# Altium PCB BRAKE PCB PROFILE.PcbDoc
Units mil, origin at the board's own origin, x right, y up, seen from the top; angles counter-clockwise.
Board outline 7818.87 x 3566.84 mil, 2 copper layers (Top Layer, Bottom Layer); 93 components, 80 nets, 336 pads, 27 vias.
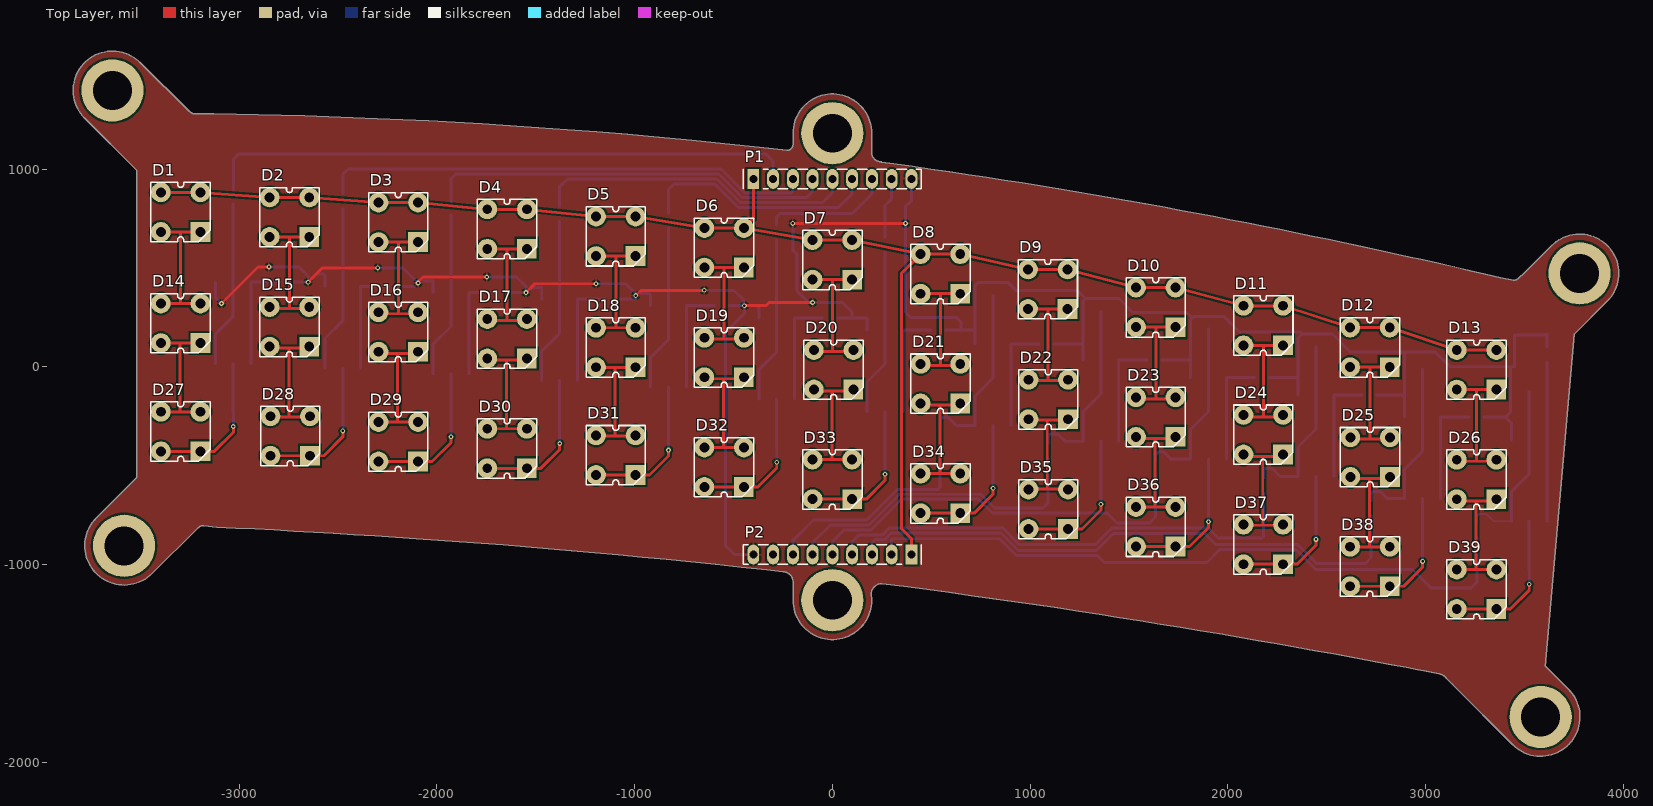
[diagram p0: Top Layer view]
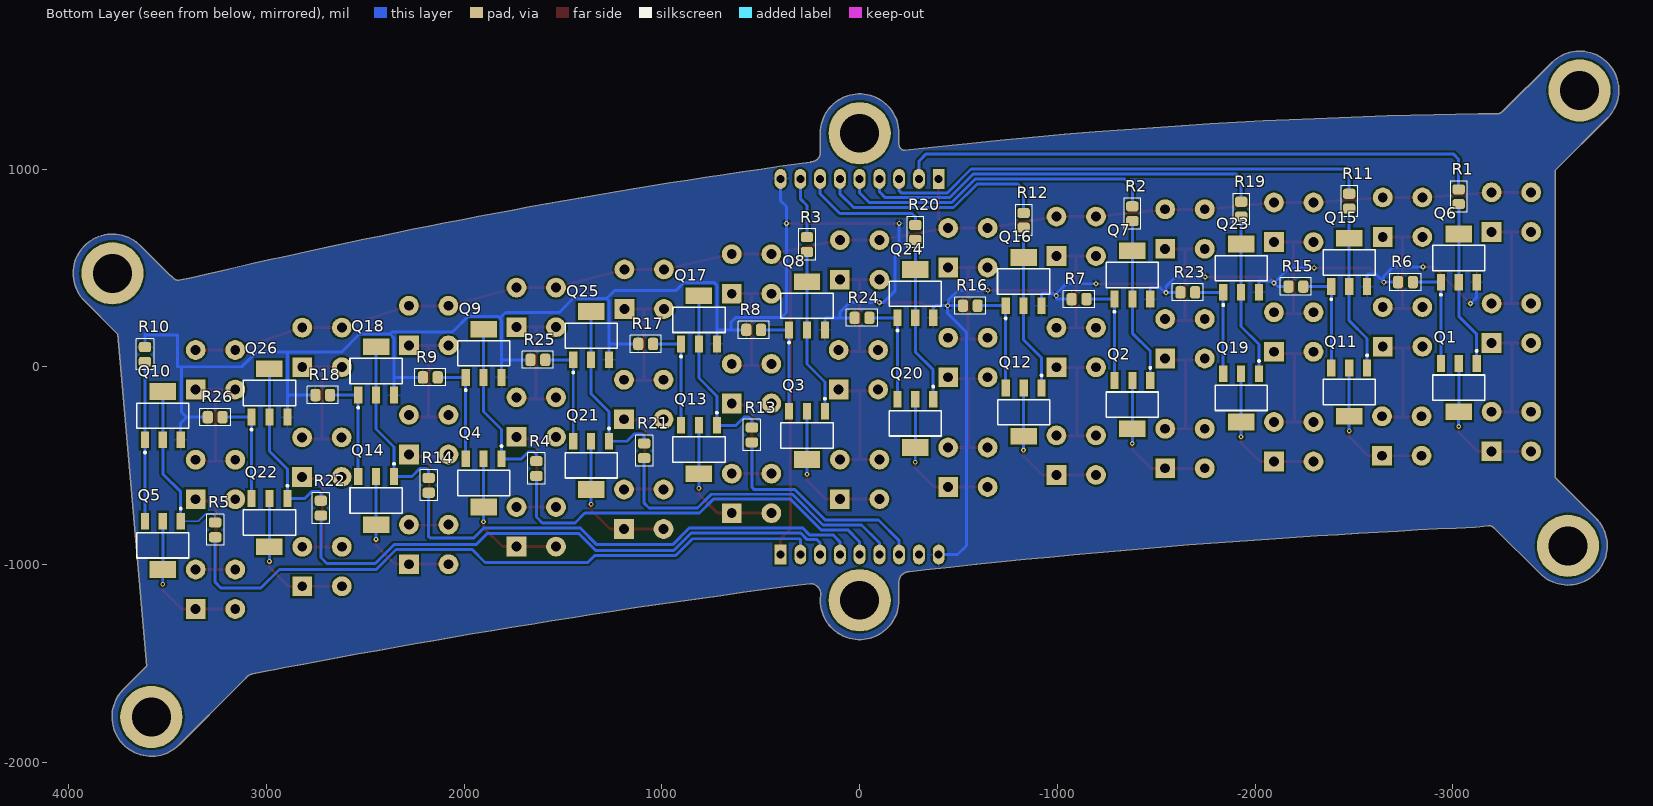
[diagram p1: Bottom Layer view, seen from below]
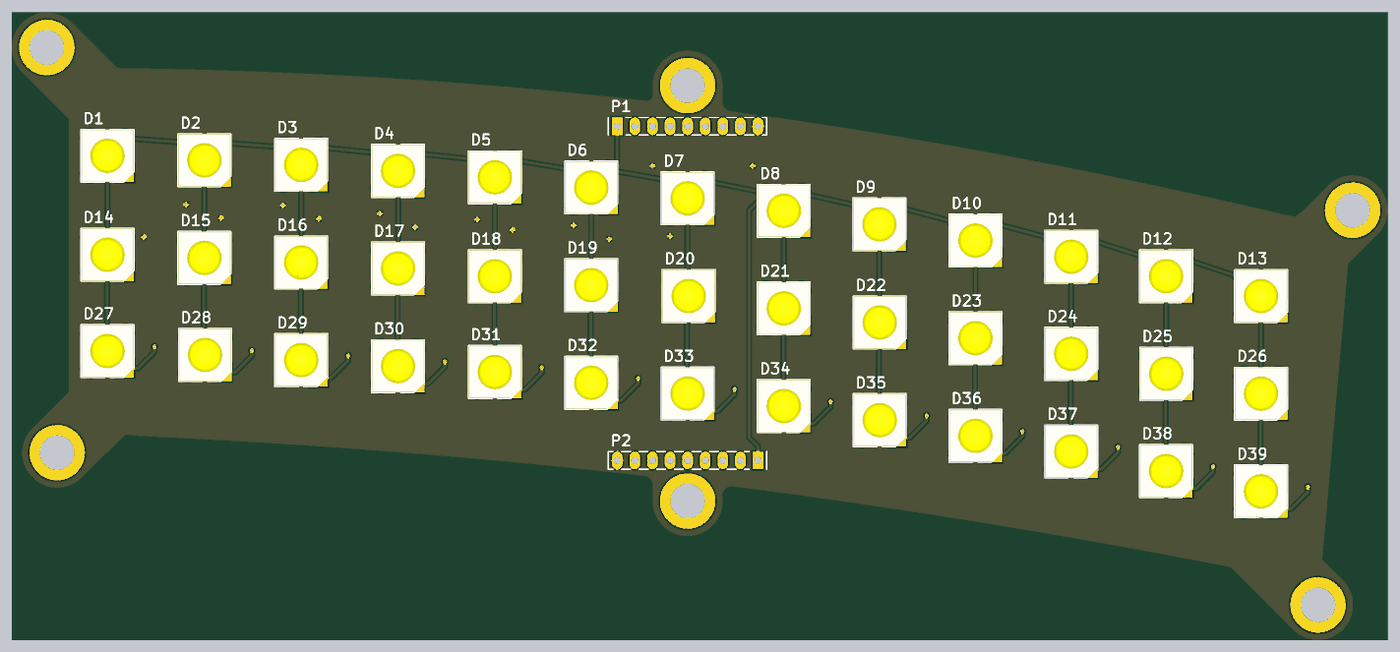
[diagram p2: 3D render of the assembled board from above, using the file's embedded part models]
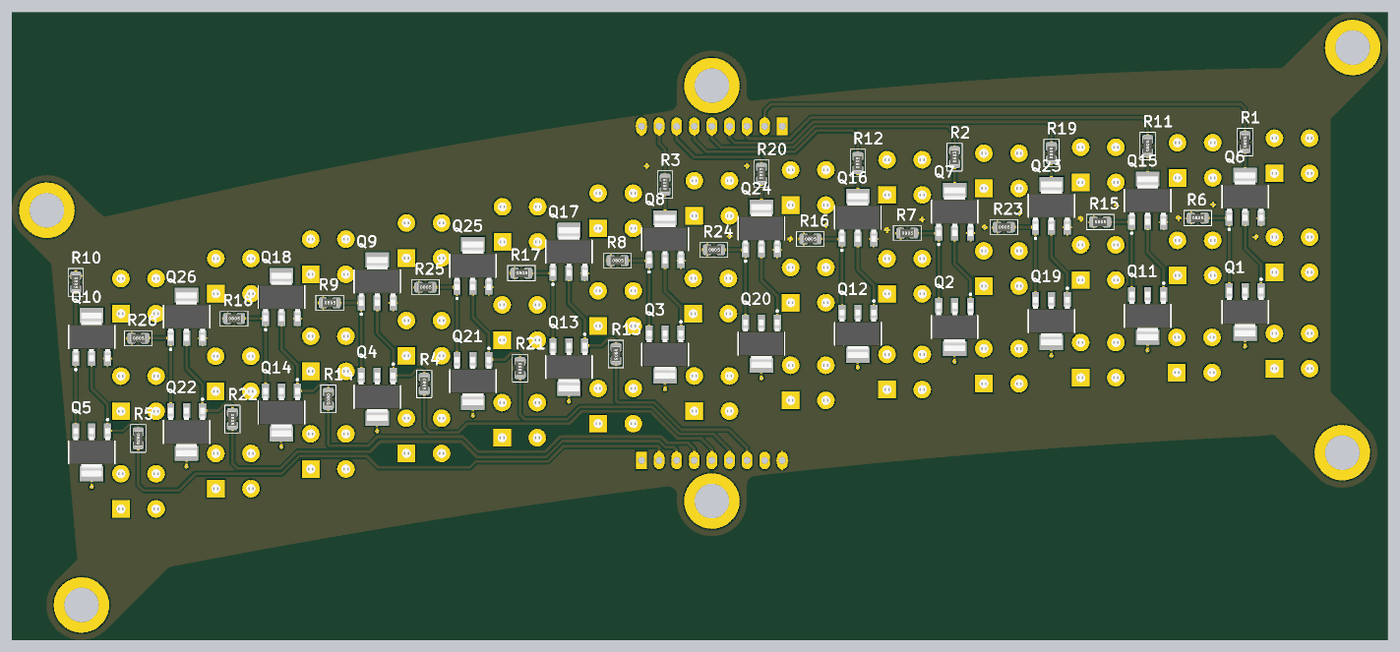
[diagram p3: 3D render of the assembled board from below, using the file's embedded part models]

## Layer stack, top to bottom
Top Solder: solder mask 0.4, Solder Resist, Dk 3.5
Top Layer: signal copper 1.4
Dielectric 1: dielectric 12.6, FR-4, Dk 4.8
Bottom Layer: signal copper 1.4
Bottom Solder: solder mask 0.4, Solder Resist, Dk 3.5

## Board outline
401 vertices, not listed, extent -3840.52,-1970.41 3978.35,1596.43

## Design rules (kind name [scope] priority, off if disabled: settings)
Clearance [All] p1: gap=10
PolygonConnect [All] p1: connectstyle=Relief reliefconductorwidth=10 reliefentries=4 polygonreliefangle="90 Angle" airgapwidth=10
RoomDefinition Indicator [InComponentClass('Indicator')] p1: confinementstyle=ConfineIn formatcopy=TRUE lockcomponents=FALSE outline -4345,-2195 5215,-2195 5215,2075 -4345,2075
RoutingVias [All] p1: holewidth=28 width=50 viastyle="Through Hole" minholewidth=12 minwidth=24 maxholewidth=28 maxwidth=50
SolderMaskExpansion [All] p1: expansion=4
Width [All] p1: maxlimit=100 minlimit=10 preferedwidth=10
30 further rules are at their usual default settings.

## Components (designator, comment, footprint, x,y, rotation, side; value= is the part's Value field where it differs from the comment)
D1 "AMBER" "CREE P4 YELLOW"#1 -3296.96,782.24 r180 top
D2 "AMBER" "CREE P4 YELLOW"#1 -2746.38,756.42 r180 top
D3 "AMBER" "CREE P4 YELLOW"#1 -2195.81,730.61 r180 top
D4 "AMBER" "CREE P4 YELLOW"#1 -1645.69,696.46 r180 top
D5 "AMBER" "CREE P4 YELLOW"#1 -1095.52,659.72 r180 top
D6 "AMBER" "CREE P4 YELLOW"#1 -547.76,601.72 r180 top
D7 "AMBER" "CREE P4 YELLOW"#1 0,540.4 r180 top
D8 "AMBER" "CREE P4 YELLOW"#1 546.6,469.46 r180 top
D9 "AMBER" "CREE P4 YELLOW"#1 1090,392.31 r180 top
D10 "AMBER" "CREE P4 YELLOW"#1 1635.86,300.24 r180 top
D11 "AMBER" "CREE P4 YELLOW"#1 2180,208.31 r180 top
D12 "AMBER" "CREE P4 YELLOW"#1 2719.2,97.88 r180 top
D13 "AMBER" "CREE P4 YELLOW"#1 3258.6,-15.47 r180 top
D14 "AMBER" "CREE P4 YELLOW"#1 -3296.96,219.72 r180 top
D15 "AMBER" "CREE P4 YELLOW"#1 -2746.38,201.54 r180 top
D16 "AMBER" "CREE P4 YELLOW"#1 -2195.81,175.73 r180 top
D17 "AMBER" "CREE P4 YELLOW"#1 -1645.69,141.58 r180 top
D18 "AMBER" "CREE P4 YELLOW"#1 -1095.52,97.21 r180 top
D19 "AMBER" "CREE P4 YELLOW"#1 -547.76,46.84 r180 top
D20 "AMBER" "CREE P4 YELLOW"#1 6.11,-15.28 r180 top
D21 "AMBER" "CREE P4 YELLOW"#1 546.6,-85.42 r180 top
D22 "AMBER" "CREE P4 YELLOW"#1 1091.91,-165.64 r180 top
D23 "AMBER" "CREE P4 YELLOW"#1 1635.86,-254.65 r180 top
D24 "AMBER" "CREE P4 YELLOW"#1 2179.8,-343.65 r180 top
D25 "AMBER" "CREE P4 YELLOW"#1 2720.14,-457.19 r180 top
D26 "AMBER" "CREE P4 YELLOW"#1 3258.6,-570.36 r180 top
D27 "AMBER" "CREE P4 YELLOW"#1 -3296.96,-327.91 r180 top
D28 "AMBER" "CREE P4 YELLOW"#1 -2742.54,-350.23 r180 top
D29 "AMBER" "CREE P4 YELLOW"#1 -2195.81,-379.54 r180 top
D30 "AMBER" "CREE P4 YELLOW"#1 -1645.69,-413.68 r180 top
D31 "AMBER" "CREE P4 YELLOW"#1 -1095.52,-447.11 r180 top
D32 "AMBER" "CREE P4 YELLOW"#1 -547.76,-508.43 r180 top
D33 "AMBER" "CREE P4 YELLOW"#1 0,-569.75 r180 top
D34 "AMBER" "CREE P4 YELLOW"#1 546.6,-640.69 r180 top
D35 "AMBER" "CREE P4 YELLOW"#1 1091.91,-720.91 r180 top
D36 "AMBER" "CREE P4 YELLOW"#1 1635.86,-809.91 r180 top
D37 "AMBER" "CREE P4 YELLOW"#1 2179.8,-898.92 r180 top
D38 "AMBER" "CREE P4 YELLOW"#1 2719.2,-1010.28 r180 top
D39 "AMBER" "CREE P4 YELLOW"#2 3258.6,-1125.62 r0 top
P1 "Header 9" "HEADER 1x9" 0,950 r0 top
P2 "Header 9" "HEADER 1x9" 0,-950 r180 top
Q1 "BCP56" SOT223 -3030.86,-105.86 r0 bottom
Q2 "BCP56" SOT223 -1379.59,-191.64 r0 bottom
Q3 "BCP56" SOT223 266.1,-347.7 r0 bottom
Q4 "BCP56" SOT223 1901.96,-587.86 r0 bottom
Q5 "BCP56" SOT223 3524.7,-903.57 r0 bottom
Q6 "BCP56" SOT223 -3030.86,550 r180 bottom
Q7 "BCP56" SOT223 -1379.59,464.23 r180 bottom
Q8 "BCP56" SOT223 266.1,308.16 r180 bottom
Q9 "BCP56" SOT223 1901.95,68 r180 bottom
Q10 "BCP56" SOT223 3524.7,-247.71 r180 bottom
Q11 "BCP56" SOT223 -2476.44,-128.19 r0 bottom
Q12 "BCP56" SOT223 -830,-230 r0 bottom
Q13 "BCP56" SOT223 812.7,-418.64 r0 bottom
Q14 "BCP56" SOT223 2445.9,-676.87 r0 bottom
Q15 "BCP56" SOT223 -2476.45,527.68 r180 bottom
Q16 "BCP56" SOT223 -829.42,430.8 r180 bottom
Q17 "BCP56" SOT223 812.69,237.22 r180 bottom
Q18 "BCP56" SOT223 2445.9,-21.01 r180 bottom
Q19 "BCP56" SOT223 -1929.71,-157.49 r0 bottom
Q20 "BCP56" SOT223 -281.66,-286.38 r0 bottom
Q21 "BCP56" SOT223 1358.01,-498.86 r0 bottom
Q22 "BCP56" SOT223 2985.3,-788.23 r0 bottom
Q23 "BCP56" SOT223 -1929.71,498.37 r180 bottom
Q24 "BCP56" SOT223 -281.66,369.48 r180 bottom
Q25 "BCP56" SOT223 1358.01,157 r180 bottom
Q26 "BCP56" SOT223 2985.3,-132.37 r180 bottom
R1 "1k" "RESISTOR 0805" -3030,860 r90 bottom
R2 "1k" "RESISTOR 0805" -1379.59,774.23 r90 bottom
R3 "1k" "RESISTOR 0805" 266.1,618.16 r90 bottom
R4 "1k" "RESISTOR 0805" 1635,-515 r270 bottom
R5 "1k" "RESISTOR 0805" 3260,-825 r270 bottom
R6 "8R2" "RESISTOR 0805" -2761.16,427.95 r180 bottom
R7 "8R2" "RESISTOR 0805" -1109.89,342.18 r180 bottom
R8 "8R2" "RESISTOR 0805" 535.8,186.11 r180 bottom
R9 "8R2" "RESISTOR 0805" 2171.65,-54.05 r180 bottom
R10 "8R2" "RESISTOR 0805" 3615,62.29 r270 bottom
R11 "1k" "RESISTOR 0805" -2476.45,837.68 r90 bottom
R12 "1k" "RESISTOR 0805" -829.42,740.8 r90 bottom
R13 "1k" "RESISTOR 0805" 545,-345 r270 bottom
R14 "1k" "RESISTOR 0805" 2180,-600 r270 bottom
R15 "8R2" "RESISTOR 0805" -2206.75,405.63 r180 bottom
R16 "8R2" "RESISTOR 0805" -559.72,308.76 r180 bottom
R17 "8R2" "RESISTOR 0805" 1082.39,115.18 r180 bottom
R18 "8R2" "RESISTOR 0805" 2715.6,-143.06 r180 bottom
R19 "1k" "RESISTOR 0805" -1930,797.4 r90 bottom
R20 "1k" "RESISTOR 0805" -281.66,679.48 r90 bottom
R21 "1k" "RESISTOR 0805" 1090,-425 r270 bottom
R22 "1k" "RESISTOR 0805" 2725,-715 r270 bottom
R23 "8R2" "RESISTOR 0805" -1660.01,376.32 r180 bottom
R24 "8R2" "RESISTOR 0805" -11.96,247.44 r180 bottom
R25 "8R2" "RESISTOR 0805" 1627.71,34.96 r180 bottom
R26 "8R2" "RESISTOR 0805" 3260,-255 r180 bottom

## Footprints (in the part's own frame and the unit in brackets; to place one, negate y for a bottom-side part, rotate by r counter-clockwise, add the part's x,y. Pads: shape width x height; smd on the part's side, far side on the other; paste and mask are expansions set on the pad)
"CREE P4 YELLOW"#1 [mil] "CREE P4 YELLOW"
  rect 100x100 hole 50: 1(-100,100)
  round 100 hole 50: 2(-100,-100) 3(100,-100) 4(100,100)
  silkscreen extent -150,-150 150,150, body extent -150,-150 150,150, height 272
"CREE P4 YELLOW"#2 [mil] "CREE P4 YELLOW"
  rect 100x100 hole 50: 1(100,-100)
  round 100 hole 50: 2(100,100) 3(-100,100) 4(-100,-100)
  silkscreen extent -150,-150 150,150, body extent -150,-150 150,150, height 272
"HEADER 1x9" [mil]
  rect 60x100 hole 40: 1(-400,0)
  oval 60x100 hole 40: 2(-300,0) 3(-200,0) 4(-100,0) 5(0,0) 6(100,0) 7(200,0) 8(300,0) 9(400,0)
  silkscreen extent -450,-50 450,50
"RESISTOR 0805" [mm]
  rrect50% 1.3x1.6 smd: 1(-0.95,0) 2(0.95,0)
  silkscreen extent -2,-1.1 2,1.1, body extent -1.25,-0.62 1.25,0.62, height 0.8
SOT223 [mm] "SOT-223/SC-73; 4 Leads; Body 6.7 x 7.3 mm, inc. leads (LxW max)"
  rect 1.05x2.15 smd: 1(-2.3,-3.1) 2(0,-3.1) 3(2.3,-3.1)
  rect 3.4x2.15 smd: 2(0,3.1)
  silkscreen extent -3.35,-4.85 3.35,1.62, body extent -3.25,-3.5 3.25,3.5, height 1.67

## Part data
D1 D2 D3 D4 D5 D6 D7 D8 D9 D10 D11 D12 D13 D14 D15 D16 D17 D18 D19 D20 D21 D22 D23 D24 D25 D26 D27 D28 D29 D30 D31 D32 D33 D34 D35 D36 D37 D38 D39: library part CP41B-AFSCM0Q0264, "CREE AMBER LED P4 (SUPERFLUX)"
P1 P2: "Header, 9-Pin"
Q1 Q2 Q3 Q4 Q5 Q6 Q7 Q8 Q9 Q10 Q11 Q12 Q13 Q14 Q15 Q16 Q17 Q18 Q19 Q20 Q21 Q22 Q23 Q24 Q25 Q26: library part NPN, "BCP56 80 V, 1 A NPN medium power transistors"
R1 R2 R3 R4 R5 R6 R7 R8 R9 R10 R11 R12 R13 R14 R15 R16 R17 R18 R19 R20 R21 R22 R23 R24 R25 R26: library part Res2, "Resistor"

## Free pads (board coordinates)
  round 314.96 hole 196.85 unplated: MOUNT(-3641.73,1397.64) MOUNT(-3582.99,-905.93) MOUNT(0,-1181.1) MOUNT(0,1181.1) MOUNT(3582.68,-1771.65) MOUNT(3779.53,472.44)

## Via types
v1: diameter 24, hole 12, Top Layer to Bottom Layer, 27 vias

## Nets (pads, with @x,y where several pads share a name; then routed paths per layer and width w, separated by ;. In a path a pad name is that pad's centre, name@x,y a point inside that pad or via, vN(x,y) a via of type N, cw(c..) or ccw(c..) an arc to the next point about the centre after c; other vN are vias at no path point)
DRIVE_0: P1.2 R1.2 | length 2997.5
  Bottom Layer w15: R1.2 -3030,1050 -3005,1075 -335,1075 -300,1040 P1.2
DRIVE_1: P1.3 R11.2 | length 2499.7
  Bottom Layer w15: R11.2 -2476.45,973.55 -2450,1000 -563.93,1000 -443.93,880 -210,880 -200,890 P1.3
DRIVE_2: P1.4 R19.2 | length 2082.7
  Bottom Layer w15: R19.2 -1930,950 -1905,975 -574.29,975 -454.29,855 -130,855 -100,885 P1.4
DRIVE_3: P1.5 R2.2 | length 1635.2
  Bottom Layer w15: R2.2 -1379.59,910.41 -1340,950 -584.64,950 -464.64,830 -50,830 0,880 P1.5
DRIVE_4: P1.6 R12.2 | length 1213.2
  Bottom Layer w15: R12.2 -830,778.78 -830,895 -800,925 -595,925 -475,805 30,805 100,875 P1.6
DRIVE_5: P1.7 R20.2 | length 646.4
  Bottom Layer w15: R20.2 -281.66,758.34 -265,775 100,775 200,875 P1.7
DRIVE_6: P1.8 R3.2 | length 308.5
  Bottom Layer w15: R3.2 266.1,816.1 300,850 P1.8
DRIVE_7: P2.7 R13.2 | length 1154.4
  Bottom Layer w15: P2.7 -200,-880 -95,-775 174.29,-775 329.29,-620 535,-620 545,-610 R13.2
DRIVE_8: P2.6 R21.2 | length 1618.4
  Bottom Layer w15: P2.6 -100,-890 -10,-800 184.64,-800 339.64,-645 750.36,-645 820.36,-715 1065,-715 1090,-690 R21.2
DRIVE_9: P2.5 R4.2 | length 2058.8
  Bottom Layer w15: P2.5 0,-885 60,-825 195,-825 350,-670 740,-670 810,-740 1390,-740 1440,-790 1605,-790 1635,-760 R4.2
DRIVE_10: P2.4 R14.2 | length 2491
  Bottom Layer w15: P2.4 100,-885 135,-850 254.29,-850 289.29,-815 860.71,-815 945.71,-900 1329.64,-900 1414.64,-815 1900,-815 1951.42,-866.42 2173.58,-866.42 2180,-860 R14.2
DRIVE_11: P2.3 R22.2 | length 2967.5
  Bottom Layer w15: P2.3 200,-890 215,-875 264.64,-875 299.64,-840 850.36,-840 940.36,-930 1335,-930 1422.59,-842.41 1882.41,-842.41 1940,-900 2355.36,-900 2450.36,-995 2695,-995 2725,-965 R22.2
DRIVE_12: P2.2 R5.2 | length 3434.5
  Bottom Layer w15: P2.2 300,-875 305,-870 845,-870 930,-955 1340,-955 1375,-990 1895,-990 1960,-925 2345,-925 2445,-1025 2935,-1025 3030,-1120 3230,-1120 3260,-1090 R5.2
GND: P1.9 P2.9 Q6.3 Q7.3 Q8.3 Q9.3 Q10.3 Q15.3 Q16.3 Q17.3 Q18.3 Q23.3 Q24.3 Q25.3 Q26.3 R6.1 R7.1 R8.1 R9.1 R10.1 R15.1 R16.1 R17.1 R18.1 R23.1 R24.1 R25.1 R26.1 | length 14609.8
  Top Layer w15: v1(-3090,320) -2905,505 v1(-2850,505) ; v1@-2650,430 -2580,500 v1(-2300,500) ; v1@-2095,430 -2071.11,453.89 v1(-1748.05,453.89) ; v1(-1550,375) -1505.26,419.74 v1(-1195.44,419.74) ; v1(-995,360) -968.68,386.32 v1(-647.76,386.32) ; v1(-445,308.76) -445,310 -335,310 -320,325 v1(-100,325) ; v1(-200,725) v1(370,725)
  Bottom Layer w15: Q6.3 -3121.41,351.41 v1(-3090,320) ; v1(-2850,505) v1@-2849.72,505 ; v1@-2849.2,505.52 -2699.2,505.52 -2650.2,456.51 v1@-2650.2,429.8 ; R6.1 v1(-2652.05,427.95) ; Q15.3 -2567,463 -2573.99,470 -2610,470 v1@-2650.2,429.8 ; v1(-2300,500) -2172.08,500 v1(-2095.78,423.7) ; R15.1 -2113.85,405.63 v1(-2095.78,423.7) ; Q23.3 -2020.26,434.74 -2084.74,434.74 v1(-2095.78,423.7) ; v1(-1748.05,453.89) -1598.05,453.89 -1549.05,404.89 v1@-1549.05,376.32 ; R23.1 -1621.28,375 v1(-1550,375) -1545,375 -1519.86,400.14 -1470.14,400.14 Q7.3 ; v1(-1195.44,419.74) -1045.44,419.74 -996.44,370.74 v1@-996.44,360 ; R7.1 -996.44,342.18 -996.44,353.56 -980,370 -925,370 -919.97,364.97 Q16.3 ; v1(-647.76,386.32) -497.76,386.32 -448.76,337.32 v1@-448.76,308.76 ; R16.1 v1@-448.76,308.76 ; P2.9 -495,-950 -540,-905 -540,175 -445,270 v1(-445,308.76) ; Q24.3 -372.21,297.21 -383.76,308.76 v1(-445,308.76) ; v1(-200,725) -200,590 -180,570 -180,385 -120,325 v1(-100,325) 50,325 99,276 99,247.44 ; R24.1 99,247.44 ; Q8.3 175.55,244.45 172.56,247.44 99,247.44 ; P1.9 400,840 370,810 v1(370,725) 370,275 395,250 625,250 650,225 650,186.11 ; R8.1 650,186.11 ; Q17.3 722.14,185 ; R17.1 1267.28,115.18 1267.46,115 ; Q25.3 1267.46,115 ; R25.1 1811.36,34.96 1811.4,35 ; Q9.3 1811.4,35 ; R9.1 2354.05,-54.05 ; Q18.3 2355,-142.71 2355,144.14 2375.86,165 ; R18.1 2883.06,-143.06 2894.75,-154.75 ; Q26.3 2894.75,-154.75 ; R26.1 3405,-255 ; Q10.3 3434.15,-284.15 3405,-255 ; R10.1 3615,165 3610,160 3450,160 3450,0 3425,0 ; v1(-2652.05,427.95) -2650.2,427.95 v1@-2650.2,429.8 ; v1(-2652.05,427.95) v1@-2650.2,429.8 ; v1@-448.76,308.76 v1(-445,308.76) ; 650,186.11 721.03,186.11 722.14,185 ; 722.14,185 722.14,412.14 735,425 890,425 930,385 1240,385 1280,345 ; 1267.46,115 1267.46,332.46 1280,345 ; 1280,345 1450,345 1520,275 1791.4,275 1820.7,245.7 ; 1811.4,35 1811.4,236.4 1820.7,245.7 ; 1820.7,245.7 1830,255 1980,255 2059.19,175.81 2365.05,175.81 2375.86,165 ; 2375.86,165 2530,165 2620,75 2905,75 ; 2894.75,-154.75 2894.75,64.75 2905,75 ; 2905,75 3050,75 3125,0 3425,0 ; 3405,-255 3430,-230 3430,-5 3425,0
NetD1_1: D1.1 D1.4 D14.2 D14.3 | length 762.5
  Top Layer w15: D14.3 -3296.96,319.72 ; D1.4 -3296.96,682.24 ; D14.2 -3296.96,319.72 ; D1.1 -3296.96,682.24 ; -3296.96,319.72 -3296.96,682.24
NetD2_1: D2.1 D2.4 D15.2 D15.3 | length 762.5
  Top Layer w15: D15.3@-2846.38,293.91 -2746.38,293.91 ; D2.4 -2746.38,656.42 ; D15.2@-2646.38,293.91 -2746.38,293.91 ; D2.1 -2746.38,656.42 ; -2746.38,293.91 -2746.38,656.42
NetD3_1: D3.1 D3.4 D16.2 D16.3 | length 762.5
  Top Layer w15: D16.3@-2295.81,268.1 -2195.81,268.1 ; D3.4 -2195.81,630.61 ; D16.2@-2095.81,268.1 -2195.81,268.1 ; D3.1 -2195.81,630.61 ; -2195.81,268.1 -2195.81,630.61
NetD4_1: D4.1 D4.4 D17.2 D17.3 | length 762.5
  Top Layer w15: D17.3@-1745.69,233.95 -1645.69,233.95 ; D4.4 -1645.69,596.46 ; D17.2@-1545.69,233.95 -1645.69,233.95 ; D4.1 -1645.69,596.46 ; -1645.69,233.95 -1645.69,596.46
NetD5_1: D5.1 D5.4 D18.2 D18.3 | length 762.5
  Top Layer w15: D18.3 -1095.52,197.21 ; D5.4 -1095.52,559.72 ; D18.2 -1095.52,197.21 ; D5.1 -1095.52,559.72 ; -1095.52,197.21 -1095.52,559.72
NetD6_1: D6.1 D6.4 D19.2 D19.3 | length 762.5
  Top Layer w15: D19.3@-647.76,139.21 -547.76,139.21 ; D6.4 -547.76,501.72 ; D19.2@-447.76,139.21 -547.76,139.21 ; D6.1 -547.76,501.72 ; -547.76,139.21 -547.76,501.72
NetD7_1: D7.1 D7.4 D20.2 D20.3 | length 762.5
  Top Layer w15: D20.3@-100,77.89 0,77.89 ; D7.4 0,440.4 ; D20.2@100,77.89 0,77.89 ; D7.1 0,440.4 ; 0,77.89 0,440.4
NetD8_1: D8.1 D8.4 D21.2 D21.3 | length 762.5
  Top Layer w15: D21.3@446.6,6.95 546.6,6.95 ; D8.4 546.6,369.46 ; D21.2@646.6,6.95 546.6,6.95 ; D8.1 546.6,369.46 ; 546.6,6.95 546.6,369.46
NetD9_1: D9.1 D9.4 D22.2 D22.3 | length 762.5
  Top Layer w15: D22.3@990,-70.21 1090,-70.21 ; D9.4 1090,292.31 ; D22.2@1190,-70.21 1090,-70.21 ; D9.1 1090,292.31 ; 1090,-70.21 1090,292.31
NetD10_1: D10.1 D10.4 D23.2 D23.3 | length 762.5
  Top Layer w15: D23.3@1535.86,-162.28 1635.86,-162.28 ; D10.4 1635.86,200.24 ; D23.2@1735.86,-162.28 1635.86,-162.28 ; D10.1 1635.86,200.24 ; 1635.86,-162.28 1635.86,200.24
NetD11_1: D11.1 D11.4 D24.2 D24.3 | length 762.5
  Top Layer w15: D24.3@2080,-254.2 2180,-254.2 ; D11.4 2180,108.31 ; D24.2@2280,-254.2 2180,-254.2 ; D11.1 2180,108.31 ; 2180,-254.2 2180,108.31
NetD12_1: D12.1 D12.4 D25.2 D25.3 | length 762.5
  Top Layer w15: D25.3@2619.2,-364.64 2719.2,-364.64 ; D12.4 2719.2,-2.12 ; D25.2@2819.2,-364.64 2719.2,-364.64 ; D12.1 2719.2,-2.12 ; 2719.2,-364.64 2719.2,-2.12
NetD13_1: D13.1 D13.4 D26.2 D26.3 | length 762.5
  Top Layer w15: D26.3@3158.6,-477.99 3258.6,-477.99 ; D13.4 3258.6,-115.47 ; D26.2@3358.6,-477.99 3258.6,-477.99 ; D13.1 3258.6,-115.47 ; 3258.6,-477.99 3258.6,-115.47
NetD14_1: D14.1 D14.4 D27.2 D27.3 | length 747.6
  Top Layer w15: D27.3 -3300,-227.91 ; D14.4 -3300,119.72 ; D27.2 -3300,-227.91 ; D14.1 -3300,119.72 ; -3300,-227.91 -3300,119.72
NetD15_1: D15.1 D15.4 D28.2 D28.3 | length 747.6
  Top Layer w15: D28.3@-2846.38,-253.72 -2749.42,-253.72 ; D15.4@-2846.38,93.91 -2749.42,93.91 ; D28.2@-2646.38,-253.72 -2749.42,-253.72 ; D15.1@-2646.38,93.91 -2749.42,93.91 ; -2749.42,-253.72 -2749.42,93.91
NetD16_1: D16.1 D16.4 D29.2 D29.3 | length 747.6
  Top Layer w15: D29.3 -2198.85,-279.54 ; D16.4@-2295.81,68.1 -2198.85,68.1 ; D29.2 -2198.85,-279.54 ; D16.1@-2095.81,68.1 -2198.85,68.1 ; -2198.85,-279.54 -2198.85,68.1
NetD17_1: D17.1 D17.4 D30.2 D30.3 | length 747.6
  Top Layer w15: D30.3 -1648.73,-313.68 ; D17.4@-1745.69,33.95 -1648.73,33.95 ; D30.2 -1648.73,-313.68 ; D17.1@-1545.69,33.95 -1648.73,33.95 ; -1648.73,-313.68 -1648.73,33.95
NetD18_1: D18.1 D18.4 D31.2 D31.3 | length 747.6
  Top Layer w15: D31.3@-1195.52,-350.42 -1098.56,-350.42 ; D18.4 -1098.56,-2.79 ; D31.2@-995.52,-350.42 -1098.56,-350.42 ; D18.1 -1098.56,-2.79 ; -1098.56,-350.42 -1098.56,-2.79
NetD19_1: D19.1 D19.4 D32.2 D32.3 | length 747.6
  Top Layer w15: D32.3 -550.8,-408.43 ; D19.4@-647.76,-60.79 -550.8,-60.79 ; D32.2 -550.8,-408.43 ; D19.1@-447.76,-60.79 -550.8,-60.79 ; -550.8,-408.43 -550.8,-60.79
NetD20_1: D20.1 D20.4 D33.2 D33.3 | length 747.6
  Top Layer w15: D33.3 -3.04,-469.75 ; D20.4@-100,-122.11 -3.04,-122.11 ; D33.2 -3.04,-469.75 ; D20.1@100,-122.11 -3.04,-122.11 ; -3.04,-469.75 -3.04,-122.11
NetD21_1: D21.1 D21.4 D34.2 D34.3 | length 747.6
  Top Layer w15: D34.3 543.56,-540.69 ; D21.4@446.6,-193.05 543.56,-193.05 ; D34.2 543.56,-540.69 ; D21.1@646.6,-193.05 543.56,-193.05 ; 543.56,-540.69 543.56,-193.05
NetD22_1: D22.1 D22.4 D35.2 D35.3 | length 747.6
  Top Layer w15: D35.3@990,-617.84 1086.96,-617.84 ; D22.4@990,-270.21 1086.96,-270.21 ; D35.2@1190,-617.84 1086.96,-617.84 ; D22.1@1190,-270.21 1086.96,-270.21 ; 1086.96,-617.84 1086.96,-270.21
NetD23_1: D23.1 D23.4 D36.2 D36.3 | length 747.6
  Top Layer w15: D36.3 1632.82,-709.91 ; D23.4@1535.86,-362.28 1632.82,-362.28 ; D36.2 1632.82,-709.91 ; D23.1@1735.86,-362.28 1632.82,-362.28 ; 1632.82,-709.91 1632.82,-362.28
NetD24_1: D24.1 D24.4 D37.2 D37.3 | length 747.6
  Top Layer w15: D37.3@2080,-801.84 2176.96,-801.84 ; D24.4@2080,-454.2 2176.96,-454.2 ; D37.2@2280,-801.84 2176.96,-801.84 ; D24.1@2280,-454.2 2176.96,-454.2 ; 2176.96,-801.84 2176.96,-454.2
NetD25_1: D25.1 D25.4 D38.2 D38.3 | length 747.6
  Top Layer w15: D38.3@2619.2,-912.27 2716.16,-912.27 ; D25.4@2619.2,-564.64 2716.16,-564.64 ; D38.2@2819.2,-912.27 2716.16,-912.27 ; D25.1@2819.2,-564.64 2716.16,-564.64 ; 2716.16,-912.27 2716.16,-564.64
NetD26_1: D26.1 D26.4 D39.2 D39.3 | length 747.6
  Top Layer w15: D39.3 3255.56,-1025.62 ; D26.4@3158.6,-677.99 3255.56,-677.99 ; D39.2 3255.56,-1025.62 ; D26.1@3358.6,-677.99 3255.56,-677.99 ; 3255.56,-1025.62 3255.56,-677.99
NetQ1_1: Q1.1 Q6.2 R1.1 | length 994.5
  Bottom Layer w10: Q6.2@-3030.86,672.05 R1.1@-3030.86,822.6
  Bottom Layer w15: Q1.1 -3121.41,164.92 -3030.86,255.47 -3030.86,427.95 -3030.86,672.05 R1.1@-3030.86,822.6
NetQ1_3: Q1.3 Q6.1 R6.2 | length 1660.5
  Bottom Layer w10: Q6.1 Q1.3 Q6.1 ; Q6.1 R6.2 Q6.1
  Bottom Layer w15: Q1.3 Q6.1 R6.2
NetQ2_1: Q2.1 Q7.2 R2.1 | length 994.5
  Bottom Layer w10: Q7.2@-1379.59,586.27 R2.1
  Bottom Layer w15: Q2.1 -1470.14,79.15 -1379.59,169.7 -1379.59,342.18 -1379.59,586.27 R2.1
NetQ2_3: Q2.3 Q7.1 R7.2 | length 1660.5
  Bottom Layer w10: Q7.1 Q2.3 Q7.1 ; Q7.1 R7.2 Q7.1
  Bottom Layer w15: Q2.3 Q7.1 R7.2
NetQ3_1: Q3.1 Q8.2 R3.1 | length 843.9
  Bottom Layer w15: Q3.1 175.55,-76.92 266.1,13.63 266.1,186.11 266.1,430.21 R3.1
NetQ3_3: Q3.3 Q8.1 R8.2 | length 1107
  Bottom Layer w10: Q3.3 Q8.1 R8.2
  Bottom Layer w15: Q3.3 Q8.1 R8.2
NetQ4_1: Q4.1 Q9.2 R4.1 | length 923.4
  Bottom Layer w15: R4.1 1635,-445 1650,-430 1675,-430 1710.82,-465.82 Q4.1 1811.4,-317.08 1901.95,-226.53 1901.95,-54.05 Q9.2@1901.95,190.05
NetQ4_3: Q4.3 Q9.1 R9.2 | length 1107
  Bottom Layer w10: Q4.3 Q9.1 R9.2
  Bottom Layer w15: Q4.3 Q9.1 R9.2
NetQ5_1: Q5.1 Q10.2 R5.1 | length 919.4
  Bottom Layer w10: R5.1 3260,-755 3270,-745 3310,-745 3346.53,-781.53 Q5.1
  Bottom Layer w15: Q5.1 3434.15,-632.79 3524.7,-542.24 3524.7,-369.76 Q10.2@3524.7,-125.67
NetQ5_3: Q5.3 Q10.1 R10.2 | length 806.2
  Bottom Layer w15: Q5.3 Q10.1 R10.2@3615.25,24.63
NetQ11_1: Q11.1 Q15.2 R11.1 | length 994.5
  Bottom Layer w10: Q15.2@-2476.45,649.72 R11.1
  Bottom Layer w15: Q11.1 -2567,142.6 -2476.45,233.15 -2476.45,405.63 -2476.45,649.72 R11.1
NetQ11_3: Q11.3 Q15.1 R15.2 | length 1660.5
  Bottom Layer w10: Q15.1 Q11.3 Q15.1 ; Q15.1 R15.2 Q15.1
  Bottom Layer w15: Q11.3 Q15.1 R15.2
NetQ12_1: Q12.1 Q16.2 R12.1 | length 994.5
  Bottom Layer w10: Q16.2@-829.42,552.85 R12.1
  Bottom Layer w15: Q12.1@-919.97,-103.01 -919.97,45.72 -829.42,136.27 -829.42,308.76 -829.42,552.85 R12.1
NetQ12_3: Q12.3 Q16.1 R16.2 | length 1660.5
  Bottom Layer w10: Q16.1 -738.87,-103.01 Q16.1 ; Q16.1 R16.2 Q16.1
  Bottom Layer w15: Q12.3@-738.87,-103.01 Q16.1 R16.2
NetQ13_1: Q13.1 Q17.2 R13.1 | length 931.6
  Bottom Layer w15: R13.1 545,-270 560,-255 585,-255 626.59,-296.59 Q13.1 722.14,-147.86 812.69,-57.31 812.69,115.18 Q17.2@812.69,359.27
NetQ13_3: Q13.3 Q17.1 R17.2 | length 553.5
  Bottom Layer w15: Q13.3 Q17.1 R17.2
NetQ14_1: Q14.1 Q18.2 R14.1 | length 927
  Bottom Layer w15: R14.1 2180,-525 2190,-515 2225,-515 2264.82,-554.82 Q14.1 2355.35,-406.09 2445.9,-315.54 2445.9,-143.06 Q18.2@2445.9,101.04
NetQ14_3: Q14.3 Q18.1 R18.2 | length 1107
  Bottom Layer w10: Q14.3 Q18.1 R18.2
  Bottom Layer w15: Q14.3 Q18.1 R18.2
NetQ19_1: Q19.1 Q23.2 R19.1 | length 994.5
  Bottom Layer w10: Q23.2@-1929.71,620.42 R19.1@-1929.71,770.97
  Bottom Layer w15: Q19.1 -2020.26,113.29 -1929.71,203.84 -1929.71,376.32 -1929.71,620.42 R19.1@-1929.71,770.97
NetQ19_3: Q19.3 Q23.1 R23.2 | length 1660.5
  Bottom Layer w10: Q23.1 Q19.3 Q23.1 ; Q23.1 R23.2 Q23.1
  Bottom Layer w15: Q19.3 Q23.1 R23.2
NetQ20_1: Q20.1 Q24.2 R20.1 | length 994.5
  Bottom Layer w10: Q24.2@-281.66,491.53 R20.1
  Bottom Layer w15: Q20.1 -372.21,-15.6 -281.66,74.95 -281.66,247.44 -281.66,491.53 R20.1
NetQ20_3: Q20.3 Q24.1 R24.2 | length 1660.5
  Bottom Layer w10: Q24.1 Q20.3 Q24.1 ; Q24.1 R24.2 Q24.1
  Bottom Layer w15: Q20.3 Q24.1 R24.2
NetQ21_1: Q21.1 Q25.2 R21.1 | length 927.8
  Bottom Layer w15: R21.1 1090,-350 1100,-340 1140,-340 1176.81,-376.81 Q21.1 1267.46,-228.08 1358.01,-137.53 1358.01,34.96 Q25.2@1358.01,279.05
NetQ21_3: Q21.3 Q25.1 R25.2 | length 1107
  Bottom Layer w10: Q21.3 Q25.1 R25.2
  Bottom Layer w15: Q21.3 Q25.1 R25.2
NetQ22_1: Q22.1 Q26.2 R22.1 | length 919.8
  Bottom Layer w15: R22.1 2725,-640 2735,-630 2770,-630 2806.18,-666.18 Q22.1 2894.75,-517.45 2985.3,-426.9 2985.3,-254.41 Q26.2@2985.3,-10.32
NetQ22_3: Q22.3 Q26.1 R26.2 | length 1108.5
  Bottom Layer w10: Q22.3 3075.85,-260 3080.85,-255 R26.2
  Bottom Layer w15: Q22.3 Q26.1 R26.2@3217.6,-254.41
SINK_0: D27.1 D27.4 Q1.2 | length 754.6
  Top Layer w15: D27.4 -3126.19,-427.91 -3030.56,-332.29 v1(-3030.56,-302.29)
  Bottom Layer w15: Q1.2@-3030.86,16.19 -3030.86,-227.91 -3030.56,-228.21 v1(-3030.56,-302.29)
SINK_1: D28.1 D28.4 Q11.2 | length 754.6
  Top Layer w15: D28.4 -2571.77,-450.23 -2476.14,-354.61 v1(-2476.14,-324.61)
  Bottom Layer w15: Q11.2@-2476.44,-6.14 -2476.44,-250.23 -2476.14,-250.53 v1(-2476.14,-324.61)
SINK_2: D29.1 D29.4 Q19.2 | length 754.6
  Top Layer w15: D29.4 -2025.03,-479.54 -1929.41,-383.91 v1(-1929.41,-353.91)
  Bottom Layer w15: Q19.2@-1929.71,-35.44 -1929.71,-279.54 -1929.41,-279.84 v1(-1929.41,-353.91)
SINK_3: D30.1 D30.4 Q2.2 | length 754.6
  Top Layer w15: D30.4 -1474.91,-513.68 -1379.29,-418.06 v1(-1379.29,-388.06)
  Bottom Layer w15: Q2.2@-1379.59,-69.59 -1379.59,-313.68 -1379.29,-313.98 v1(-1379.29,-388.06)
SINK_4: D31.1 D31.4 Q12.2 | length 754.6
  Top Layer w15: D31.4 -924.74,-547.11 -829.12,-451.48 v1(-829.12,-421.48)
  Bottom Layer w15: Q12.2@-829.42,-103.01 -829.42,-347.11 -829.12,-347.4 v1(-829.12,-421.48)
SINK_5: D32.1 D32.4 Q20.2 | length 754.6
  Top Layer w15: D32.4 -376.98,-608.43 -281.36,-512.8 v1(-281.36,-482.8)
  Bottom Layer w15: Q20.2@-281.66,-164.33 -281.66,-408.43 -281.36,-408.73 v1(-281.36,-482.8)
SINK_6: D33.1 D33.4 Q3.2 | length 754.6
  Top Layer w15: D33.4 170.77,-669.75 266.4,-574.12 v1(266.4,-544.12)
  Bottom Layer w15: Q3.2@266.1,-225.65 266.1,-469.75 266.4,-470.05 v1(266.4,-544.12)
SINK_7: D34.1 D34.4 Q13.2 | length 754.6
  Top Layer w15: D34.4 717.37,-740.69 812.99,-645.06 v1(812.99,-615.06)
  Bottom Layer w15: Q13.2@812.7,-296.59 812.7,-540.69 812.99,-540.98 v1(812.99,-615.06)
SINK_8: D35.1 D35.4 Q21.2 | length 754.6
  Top Layer w15: D35.4 1262.68,-820.91 1358.31,-725.28 v1(1358.31,-695.28)
  Bottom Layer w15: Q21.2@1358.01,-376.81 1358.01,-620.91 1358.31,-621.2 v1(1358.31,-695.28)
SINK_9: D36.1 D36.4 Q4.2 | length 754.6
  Top Layer w15: D36.4 1806.63,-909.91 1902.25,-814.29 v1(1902.25,-784.29)
  Bottom Layer w15: Q4.2@1901.96,-465.82 1901.96,-709.91 1902.25,-710.21 v1(1902.25,-784.29)
SINK_10: D37.1 D37.4 Q14.2 | length 754.6
  Top Layer w15: D37.4 2350.58,-998.92 2446.2,-903.29 v1(2446.2,-873.29)
  Bottom Layer w15: Q14.2@2445.9,-554.82 2445.9,-798.92 2446.2,-799.22 v1(2446.2,-873.29)
SINK_11: D38.1 D38.4 Q22.2 | length 754.6
  Top Layer w15: D38.4 2889.98,-1110.28 2985.6,-1014.65 v1(2985.6,-984.65)
  Bottom Layer w15: Q22.2@2985.3,-666.18 2985.3,-910.28 2985.6,-910.57 v1(2985.6,-984.65)
SINK_12: D39.1 D39.4 Q5.2 | length 754.6
  Top Layer w15: D39.4 3429.38,-1225.62 3525,-1130 v1(3525,-1100)
  Bottom Layer w15: Q5.2@3524.7,-781.53 3524.7,-1025.62 3525,-1025.92 v1(3525,-1100)
V+: D1.2 D1.3 D2.2 D2.3 D3.2 D3.3 D4.2 D4.3 D5.2 D5.3 D6.2 D6.3 D7.2 D7.3 D8.2 D8.3 D9.2 D9.3 D10.2 D10.3 D11.2 D11.3 D12.2 D12.3 D13.2 D13.3 P1.1 P2.1 | length 8695.3
  Top Layer w15: D1.3 D1.2 D2.3 D2.2 D3.3 D3.2 D4.3 D4.2 D5.3 D5.2 D6.3 D6.2 ; P1.1 -400,749.48 D6.2 ; P2.1 400,-870 350,-820 350,472.87 D8.3 ; D13.2 D13.3 D12.2 D12.3 D11.2 D11.3 D10.2 D10.3 D9.2 D9.3 D8.2 D8.3 ; D6.2 D7.3 D7.2 D8.3
pads on no net: P2.8

## Polygon pours and split planes (outlines as drawn)
GND on Top Layer "TOP GND" (solid, remove dead copper, pour order 0): 401 vertices, not listed, extent -3840.52,-1970.41 3978.35,1596.43
GND on Bottom Layer "BOTTOM GND" (solid, remove dead copper, pour order 1): 401 vertices, not listed, extent -3840.52,-1970.41 3978.35,1596.43

## Silkscreen, mask and mechanical layers (free items; w line width, h text height)
Mechanical 1:
  drawing of 151 lines, arcs and shapes, not listed
Mechanical 2:
  drawing of 1277 lines, arcs and shapes, not listed